# Altium PCB SensorPlatformV3.PcbDoc
Units mm, origin at the board's own origin, x right, y up, seen from the top; angles counter-clockwise.
Board outline 100 x 47 mm, 4 copper layers (Top Layer, Signal Layer 1, Signal Layer 2, Bottom Layer), stack 0.778 mm thick; 60 components, 59 nets, 412 pads, 0 vias.
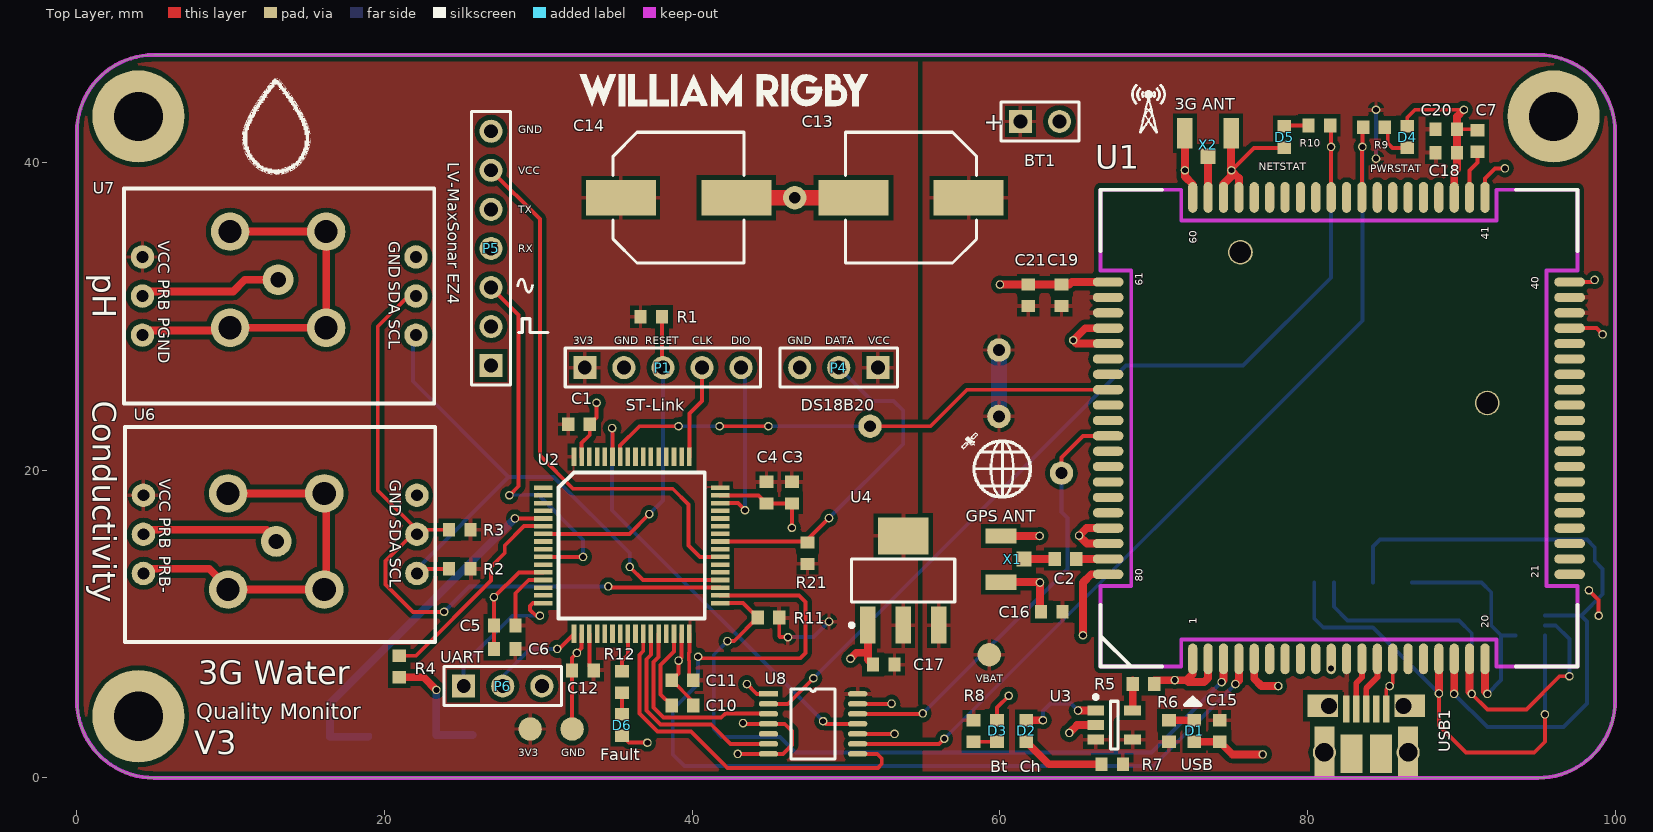
[diagram p0: Top Layer view]
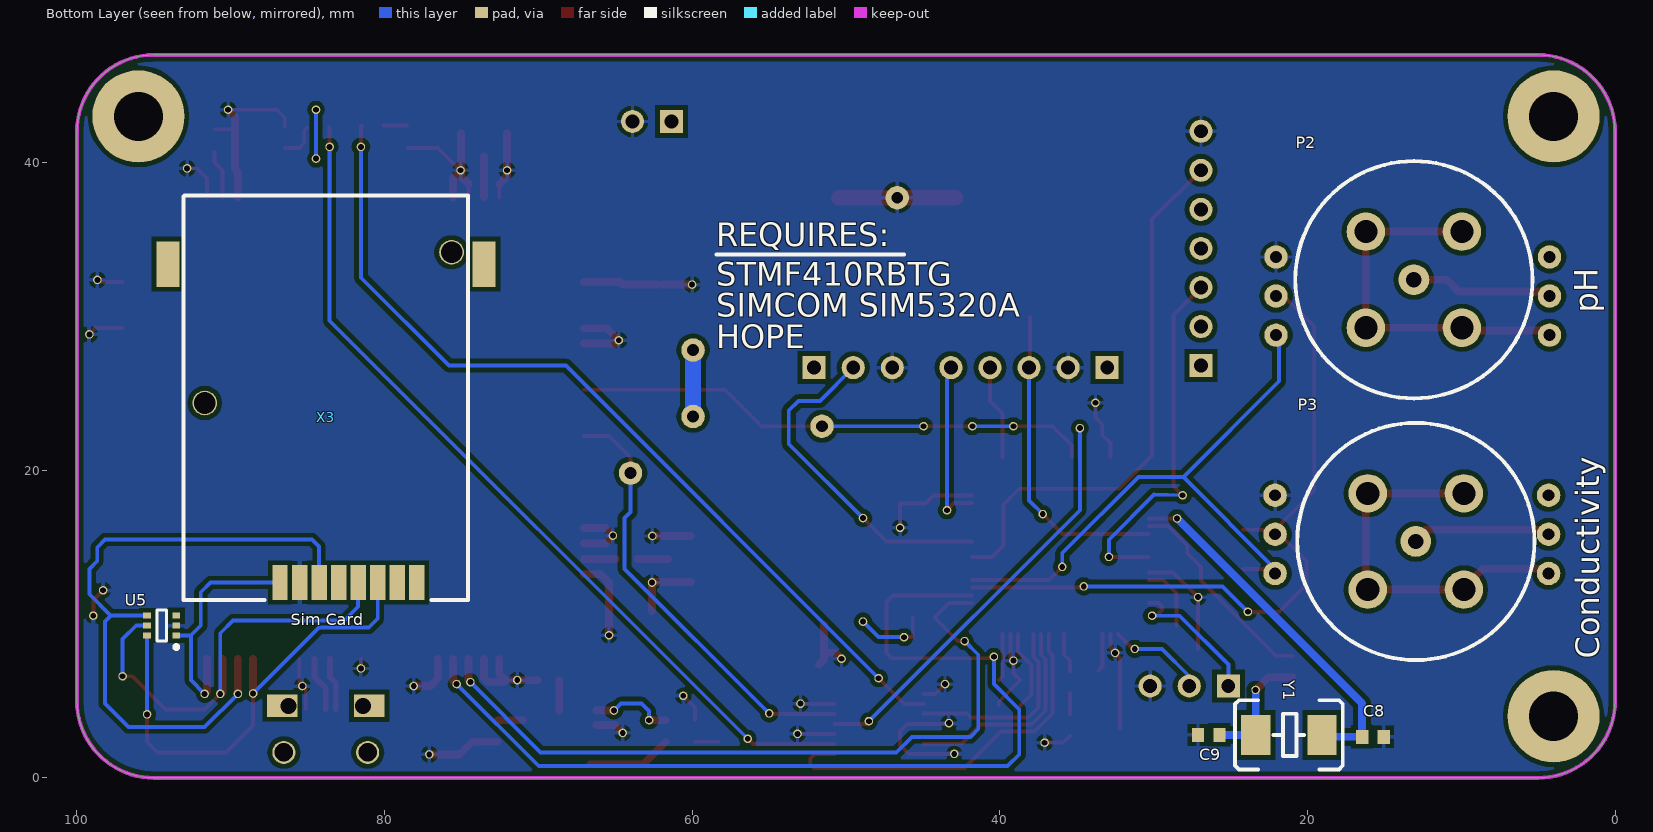
[diagram p1: Bottom Layer view, seen from below]

## Layer stack, top to bottom
Top Solder: solder mask 0.0102, Solder Resist, Dk 3.5
Top Layer: signal copper 0.0356
Dielectric 1: core 0.254, FR-4, Dk 4.2
Signal Layer 1: signal copper 0.036
Dielectric 3: prepreg 0.127, Dk 4.2
Signal Layer 2: signal copper 0.036
Dielectric 2: core 0.254, Dk 4.2
Bottom Layer: signal copper 0.0356
Bottom Solder: solder mask 0.0102, Solder Resist, Dk 3.5

## Board outline
0,5 0,42 cw(c5,42) 5,47 95,47 cw(c95,42) 100,42 100,5 cw(c95,5) 95,0 5,0 cw(c5,5)

## Design rules (kind name [scope] priority, off if disabled: settings)
Clearance [All] p1: gap=0.203 except(0.152: SMDPad-SMDPad; 0.305: Arc-Poly Track-Poly SMDPad-Poly THPad-Poly Via-Poly Fill-Poly Poly-Poly)
DiffPairsRouting [All] p1: maxlimit=0.254 minlimit=0.254 mostfreqgap=0.254 toplayer_minwidth=0.381 toplayer_maxwidth=0.381 toplayer_prefwidth=0.381 midlayer1_minwidth=0.381 midlayer1_maxwidth=0.381 midlayer1_prefwidth=0.381 midlayer2_minwidth=0.381 midlayer2_maxwidth=0.381 midlayer2_prefwidth=0.381 bottomlayer_minwidth=0.381 bottomlayer_maxwidth=0.381 bottomlayer_prefwidth=0.381 maxuncoupledlength=12.7
HoleSize [All] p1: absolutevalues=TRUE maxlimit=10.16 minlimit=0.305 maxpercent=80.000 minpercent=20.000
MatchedLengths [All] p1: tolerance=3.81 checknetsindiffpair=TRUE checkdiffpairvsdiffpair=FALSE checkxsignals=FALSE checkothers=FALSE
MinimumSolderMaskSliver [All] p1: minsoldermaskwidth=0.025
PlaneConnect [All] p1: planeconnectstyle=Relief reliefexpansion=0.508 reliefentries=4 reliefconductorwidth=0.508 reliefairgap=0.254
PolygonConnect [All] p1: connectstyle=Relief reliefconductorwidth=0.254 reliefentries=4 polygonreliefangle="90 Angle" airgapwidth=0.254
RoomDefinition SensorPlatformV3 [InComponentClass('SensorPlatformV3')] p1: confinementstyle=ConfineIn formatcopy=TRUE lockcomponents=FALSE outline -1.016,-1.905 100.838,-1.905 100.838,48.895 -1.016,48.895
RoutingVias [All] p1: holewidth=0.711 width=1.27 viastyle="Through Hole" minholewidth=0.711 minwidth=1.27 maxholewidth=0.711 maxwidth=1.27
SilkToSilkClearance [All] p1: silktosilkclearance=0.025
SilkToSolderMaskClearance [IsPad] p1: minsilkscreentomaskgap=0.025 clearancetoexposedcopper=TRUE
SolderMaskExpansion [All] p1: expansion=0.102
Width [All] p1: maxlimit=3.048 minlimit=0.152 preferedwidth=0.254
24 further rules are at their usual default settings.

## Classes and differential pairs
differential pair USB_D: +USB_D_P -USB_D_N

## Components (designator, comment, footprint, x,y, rotation, side; value= is the part's Value field where it differs from the comment)
BT1 "Battery" BAT-2 62.611,42.672 r0 top
C1 "Cap" 1608[0603] 32.639,22.987 r180 top
C2 "Cap" 1608[0603] 64.262,14.224 r180 top
C3 "Cap" 1608[0603] 46.482,18.542 r90 top
C4 "Cap" 1608[0603] 44.831,18.542 r90 top
C5 "Cap" 1608[0603] 27.813,9.906 r180 top
C6 "Cap" 1608[0603] 27.813,8.382 r180 top
C7 "Cap" 1608[0603] 91.059,41.402 r270 top
C8 "Cap" 1608[0603] 15.748,2.667 r180 bottom
C9 "Cap" 1608[0603] 26.416,2.794 r0 bottom
C10 "Cap" 1608[0603] 39.37,4.699 r180 top
C11 "Cap" 1608[0603] 39.37,6.35 r0 top
C12 "Cap" 1608[0603] 32.893,6.985 r0 top
C13 "Cap Pol2" CAPAE9983X105M 54.229,37.719 r180 top
C14 "Cap Pol2" CAPAE9983X105M 39.116,37.719 r0 top
C15 "Cap" 1608[0603] 74.295,3.048 r90 top
C16 "Cap" 1608[0603] 63.373,10.795 r0 top
C17 "Cap" 1608[0603] 52.451,7.366 r0 top
C18 "Cap" 1608[0603] 89.027,40.64 r0 top
C19 "Cap" 1608[0603] 64.008,31.369 r90 top
C20 "Cap" 1608[0603] 89.027,42.164 r0 top
C21 "Cap" 1608[0603] 61.849,31.369 r90 top
D1 "USB" 1608[0603] 72.644,3.048 r270 top
D2 "Ch" 1608[0603] 61.722,3.048 r90 top
D3 "Bt" 1608[0603] 59.817,3.048 r90 top
D4 "PWRSTAT" 1608[0603] 86.487,41.656 r90 top
D5 "NETSTAT" 1608[0603] 78.486,41.656 r270 top
D6 "Fault" 1608[0603] 35.433,3.429 r270 top
P1 "ST-Link" HDR1X5 33.02,26.67 r0 top
P2 "BNC" "BNC Connector" 13.081,32.385 r0 bottom
P3 "BNC" "BNC Connector" 12.954,15.367 r270 bottom
P4 "DS18B20" HDR1X3 52.07,26.67 r180 top
P5 "LV-MaxSonar EZ4" HDR1X7 26.924,26.797 r90 top
P6 "UART" HDR1X3 25.146,5.969 r0 top
R1 "Res1" 1608[0603] 37.338,29.972 r180 top
R2 "Res1" 1608[0603] 24.892,13.589 r0 top
R3 "Res1" 1608[0603] 24.892,16.129 r0 top
R4 "Res1" 1608[0603] 20.955,7.239 r270 top
R5 "Res1" 1608[0603] 69.342,6.096 r180 top
R6 "Res1" 1608[0603] 70.993,3.048 r270 top
R7 "Res1" 1608[0603] 67.31,0.889 r0 top
R8 "Res1" 1608[0603] 58.293,3.048 r90 top
R9 "Res1" 1608[0603] 84.328,42.291 r180 top
R10 "Res1" 1608[0603] 80.772,42.418 r0 top
R11 "Res1" 1608[0603] 44.958,10.414 r0 top
R12 "Res1" 1608[0603] 35.433,6.223 r90 top
R21 "Res1" 1608[0603] 47.498,14.605 r270 top
U1 "SIM5320A" SIM5320A 82.042,22.733 r90 top
U2 "STM32F410RBT6" STM32F410RBT6 36.068,15.113 r0 top
U3 "MCP73831T-2ACI/OT" SOT-23-OT5_N 67.437,3.429 r0 top
U4 "LM1117IMP-3.3" MP04A_N 53.721,12.827 r90 top
U5 "SMF05CT2G" ONSC-SC70-6-419B-02_W_V 94.488,9.906 r0 bottom
U6 "EZO Conductivity" "EZO Conductivity (No Writing)" 13.716,16.129 r270 top
U7 "EZO pH" "EZO pH Duplicate" 12.954,31.623 r270 top
U8 "MC74VHCT125A" TSSOP-14 44.958,5.461 r0 top
USB1 "USB Micro B Connector" "USB Micro B Connector" 83.82,1.651 r0 top
X1 "GPS ANT" "UFL Connector" 60.071,14.224 r90 top
X2 "3G ANT" "UFL Connector" 73.533,41.91 r0 top
X3 "Sim Card" "Sim Card" 73.533,12.7 r90 bottom
Y1 "XTAL" "16MHz Clock" 21.209,2.794 r0 bottom

## Footprints (in the part's own frame and the unit in brackets; to place one, negate y for a bottom-side part, rotate by r counter-clockwise, add the part's x,y. Pads: shape width x height; smd on the part's side, far side on the other; paste and mask are expansions set on the pad)
"16MHz Clock" [mm]
  rect 1.9x2.6 smd: 1(-2.15,0) 2(2.15,0)
  silkscreen extent -3.5,-2.25 3.5,2.25
1608[0603] [mm] "Chip Capacitor, Body 1.6x0.8mm, IPC High Density"
  rect 0.8x0.9 smd: 1(-0.7,0) 2(0.7,0)
  body extent -0.87,-0.48 0.87,0.48, height 1.3
BAT-2 [mm] "Battery; 2 Leads"
  rect 1.5x1.5 hole 0.9: 1(-1.27,0)
  round 1.5 hole 0.9: 2(1.27,0)
  silkscreen extent -2.54,-1.27 2.54,1.27
"BNC Connector" [mm]
  round 2 hole 1: 1(0,0)
  round 2.5 hole 1.5: 2(-3.125,-3.125) 2(-3.125,3.125) 2(3.125,-3.125) 2(3.125,3.125)
  silkscreen extent -7.71,-7.71 7.71,7.71
CAPAE9983X105M [mm] "Aluminum Electrolytic Capacitor, Body 8.30x8.30x10.50mm, IPC Low Density"
  rect 4.55x2.3 smd: 1(-3.75,0) 2(3.75,0)
  silkscreen extent -4.25,-4.25 4.25,4.25, body extent -4.25,-4.25 4.25,4.25, height 10.5
"EZO Conductivity (No Writing)" [mil]
  round 60 hole 30: 1(-88.19,330.32) 2(11.81,330.32) 3(111.81,330.32) 4(-88.19,-369.68) 5(11.81,-369.68) 6(111.81,-369.68)
  silkscreen extent -263,-417 287,377
"EZO pH Duplicate" [mil]
  round 60 hole 30: 1(-88.19,357.87) 2(11.81,357.87) 3(111.81,357.87) 4(-88.19,-342.13) 5(11.81,-342.13) 6(111.81,-342.13)
  silkscreen extent -263,-389 287,405
HDR1X3 [mm] "Connector; Header; 3 Position"
  rect 1.5x1.5 hole 0.9: 1(0,0)
  round 1.5 hole 0.9: 2(2.54,0) 3(5.08,0)
  silkscreen extent -1.27,-1.27 6.35,1.27
HDR1X5 [mm] "Connector; Header; 5 Position"
  rect 1.5x1.5 hole 0.9: 1(0,0)
  round 1.5 hole 0.9: 2(2.54,0) 3(5.08,0) 4(7.62,0) 5(10.16,0)
  silkscreen extent -1.27,-1.27 11.43,1.27
HDR1X7 [mm] "Connector; Header; 7 Position"
  rect 1.5x1.5 hole 0.9: 1(0,0)
  round 1.5 hole 0.9: 2(2.54,0) 3(5.08,0) 4(7.62,0) 5(10.16,0) 6(12.7,0) 7(15.24,0)
  silkscreen extent -1.27,-1.27 16.51,1.27
MP04A_N [mm] "SOT223, 4-Leads, Body 6.5x3.5mm, Pitch 2.3mm, Lead Span 7mm, IPC Medium Density"
  rect 2.4x1 smd: 1(-2.9,2.3) 2(-2.9,0) 3(-2.9,-2.3)
  rect 2.4x3.3 smd: 4(2.9,0)
  silkscreen extent -3.02,-3.35 1.4,3.47, body extent -1.86,-3.35 1.86,3.35, height 1.8
ONSC-SC70-6-419B-02_W_V [mm] "SOT23, 6-Leads, Body 2x1.25mm, Pitch 0.65mm"
  rect 0.5x0.4 smd: 1(-0.95,0.65) 2(-0.95,0) 3(-0.95,-0.65) 4(0.95,-0.65) 5(0.95,0) 6(0.95,0.65)
  silkscreen extent -1.07,-1 0.3,1.52, body extent -0.63,-1 0.63,1, height 1.1
SIM5320A [mm] "SIM5320A"
  oval 2x0.6 smd: 1(-15,9.5) 2(-15,8.5) 3(-15,7.5) 4(-15,6.5) 5(-15,5.5) 6(-15,4.5) 7(-15,3.5) 8(-15,2.5) 9(-15,1.5) 10(-15,0.5) 11(-15,-0.5) 12(-15,-1.5) 13(-15,-2.5) 14(-15,-3.5) 15(-15,-4.5) 16(-15,-5.5) 17(-15,-6.5) 18(-15,-7.5) 19(-15,-8.5) 20(-15,-9.5) 41(15,-9.5) 42(15,-8.5) 43(15,-7.5) 44(15,-6.5) 45(15,-5.5) 46(15,-4.5) 47(15,-3.5) 48(15,-2.5) 49(15,-1.5) 50(15,-0.5) 51(15,0.5) 52(15,1.5) 53(15,2.5) 54(15,3.5) 55(15,4.5) 56(15,5.5) 57(15,6.5) 58(15,7.5) 59(15,8.5) 60(15,9.5)
  oval 0.6x2 smd: 21(-9.5,-15) 22(-8.5,-15) 23(-7.5,-15) 24(-6.5,-15) 25(-5.5,-15) 26(-4.5,-15) 27(-3.5,-15) 28(-2.5,-15) 29(-1.5,-15) 30(-0.5,-15) 31(0.5,-15) 32(1.5,-15) 33(2.5,-15) 34(3.5,-15) 35(4.5,-15) 36(5.5,-15) 37(6.5,-15) 38(7.5,-15) 39(8.5,-15) 40(9.5,-15) 61(9.5,15) 62(8.5,15) 63(7.5,15) 64(6.5,15) 65(5.5,15) 66(4.5,15) 67(3.5,15) 68(2.5,15) 69(1.5,15) 70(0.5,15) 71(-0.5,15) 72(-1.5,15) 73(-2.5,15) 74(-3.5,15) 75(-4.5,15) 76(-5.5,15) 77(-6.5,15) 78(-7.5,15) 79(-8.5,15) 80(-9.5,15)
  Top Layer keep-out lines w0.254: -15.5,15.5 -10.25,15.5 -10.25,13.5 10.25,13.5 10.25,15.5 15.5,15.5 15.5,10.25 13.5,10.25 13.5,-10.25 15.5,-10.25 15.5,-15.5 10.25,-15.5 10.25,-13.5 -10.25,-13.5 -10.25,-15.5 -15.5,-15.5 -15.5,-10.25 -13.75,-10.25 -13.75,10.25 -15.5,10.25 -15.5,15.5
  silkscreen extent -18,-15.5 15.5,15.5
"Sim Card" [mm]
  rect 2.3x1 smd: 1(0,13.26) 2(0,11.99) 3(0,10.72) 4(0,9.45) 5(0,8.18) 6(0,6.91) ""(0,4.37) ""(0,5.64)
  round 1.6 hole 1.4: ""(11.67,18.16) ""(21.47,2.11)
  rect 2.95x1.5 smd: ""(20.7,0) ""(20.7,20.55)
  silkscreen extent -1.15,1.05 25.15,19.53
SOT-23-OT5_N [mm] "SOT23, 5-Leads, Body 2.9x1.6mm, Pitch 0.95mm, Lead Span 2.7mm, IPC Medium Density"
  rect 1.1x0.65 smd: 1(-1.2,0.95) 2(-1.2,0) 3(-1.2,-0.95) 4(1.2,-0.95) 5(1.2,0.95)
  silkscreen extent -1.32,-1.55 0.25,1.95, body extent -0.9,-1.55 0.9,1.55, height 1.45
STM32F410RBT6 [mm]
  rect 1.2x0.3 smd: 1(-5.75,3.75) 2(-5.75,3.25) 3(-5.75,2.75) 4(-5.75,2.25) 5(-5.75,1.75) 6(-5.75,1.25) 7(-5.75,0.75) 8(-5.75,0.25) 9(-5.75,-0.25) 10(-5.75,-0.75) 11(-5.75,-1.25) 12(-5.75,-1.75) 13(-5.75,-2.25) 14(-5.75,-2.75) 15(-5.75,-3.25) 16(-5.75,-3.75) 33(5.75,-3.75) 34(5.75,-3.25) 35(5.75,-2.75) 36(5.75,-2.25) 37(5.75,-1.75) 38(5.75,-1.25) 39(5.75,-0.75) 40(5.75,-0.25) 41(5.75,0.25) 42(5.75,0.75) 43(5.75,1.25) 44(5.75,1.75) 45(5.75,2.25) 46(5.75,2.75) 47(5.75,3.25) 48(5.75,3.75)
  rect 0.3x1.2 smd: 17(-3.75,-5.75) 18(-3.25,-5.75) 19(-2.75,-5.75) 20(-2.25,-5.75) 21(-1.75,-5.75) 22(-1.25,-5.75) 23(-0.75,-5.75) 24(-0.25,-5.75) 25(0.25,-5.75) 26(0.75,-5.75) 27(1.25,-5.75) 28(1.75,-5.75) 29(2.25,-5.75) 30(2.75,-5.75) 31(3.25,-5.75) 32(3.75,-5.75) 49(3.75,5.75) 50(3.25,5.75) 51(2.75,5.75) 52(2.25,5.75) 53(1.75,5.75) 54(1.25,5.75) 55(0.75,5.75) 56(0.25,5.75) 57(-0.25,5.75) 58(-0.75,5.75) 59(-1.25,5.75) 60(-1.75,5.75) 61(-2.25,5.75) 62(-2.75,5.75) 63(-3.25,5.75) 64(-3.75,5.75)
  silkscreen extent -4.75,-4.75 4.75,4.75
TSSOP-14 [mm]
  rect 1.26x0.36 smd: 1(0,0)
  oval 1.26x0.36 smd: 2(0,-0.65) 3(0,-1.3) 4(0,-1.95) 5(0,-2.6) 6(0,-3.25) 7(0,-3.9) 8(5.8,-3.9) 9(5.8,-3.25) 10(5.8,-2.6) 11(5.8,-1.95) 12(5.8,-1.3) 13(5.8,-0.65) 14(5.8,0)
  silkscreen extent 1.46,-4.23 4.34,0.33
"UFL Connector" [mm]
  rect 1x1 smd: 1(0,-1.5)
  rect 1x2 smd: 2(-1.5,0) 3(1.5,0)
"USB Micro B Connector" [mm]
  rect 0.4x1.75 smd: D+(0,2.825) D-(-0.65,2.825) GND(1.3,2.825) ID(0.65,2.825) VBUS(-1.3,2.825)
  rect 2x1.46 all layers, no hole: Mount(-2.825,3.03) Mount(2.825,3.03)
  round 1.5 hole 1.2: Mount(-2.725,0) Mount(2.725,0)
  rect 1.3x3.4 smd: Mount(-2.725,0) Mount(2.725,0)
  round 1.2 hole 1.05: Mount(-2.425,3.03) Mount(2.425,3.03)
  rect 1.425x2.5 smd: Mount(-0.95,-0.075) Mount(0.95,-0.075)

## Part data
BT1: "Multicell Battery"
C1 C2 C3 C4 C5 C6 C7 C8 C9 C10 C11 C12 C15 C16 C17 C18 C19 C20 C21: "Capacitor"
C13 C14: "Polarized Capacitor (Axial)"
D1 D2 D3 D4 D5 D6: library part LED0, "Typical INFRARED GaAs LED"
P1: library part "Header 5", "Header, 5-Pin"
P2 P3: "BNC Elbow Connector"
P4 P6: library part "Header 3", "Header, 3-Pin"
P5: library part "Header 7", "Header, 7-Pin"
R1 R2 R3 R4 R5 R6 R7 R8 R9 R10 R11 R12 R21: "Resistor"
U3: "Miniature Single-Cell, Fully Integrated Li-Ion, Li-Polymer Charge Management Controller, 4.2V, 5-Pin SOT-23, Industrial Temperature, Tape and Reel"
U4: "800mA Low-Dropout Linear Regulator, 4-pin SOT-223"
U5: "5-Line Transient Voltage Suppressor Array, 6-Pin SC70, Pb-Free, Tape and Reel"
X1 X2: library part "UFL Antenna"
X3: library part SIMCARD
Y1: "Crystal Oscillator"

## Free pads (board coordinates)
  round 0.559 hole 0.381: 0(23.368,5.715) 0(23.876,10.795) 0(27.113,11.746) 0(28.116,18.369) 0(28.476,16.863) 0(30.099,10.541) 0(31.226,8.382) 0(32.506,8.122) 0(32.905,14.363) 0(33.782,24.384) 0(34.544,12.446) 0(34.798,22.733) 0(35.941,13.716) 0(37.084,2.286) 0(37.211,17.145) 0(39.116,7.62) 0(39.116,22.86) 0(40.386,7.874) 0(41.783,22.86) 0(42.291,8.89) 0(42.963,1.561) 0(43.307,3.556) 0(43.434,17.399) 0(43.561,6.096) 0(44.958,22.86) 0(46.228,9.144) 0(46.482,16.256) 0(47.879,6.477) 0(48.514,3.683) 0(48.895,10.16) 0(48.895,16.891) 0(50.292,7.747) 0(52.959,4.826) 0(53.153,2.861) 0(54.991,4.191) 0(56.388,2.54) 0(60.006,32.069) 0(60.579,5.334) 0(62.587,15.724) 0(62.611,12.7) 0(62.8,3.748) 0(64.516,2.921) 0(64.77,28.448) 0(65.085,4.379) 0(65.151,15.748) 0(65.405,9.271) 0(71.374,6.35) 0(72.033,39.497) 0(74.422,6.223) 0(75.057,39.497) 0(75.311,6.096) 0(77.089,1.524) 0(78.105,5.969) 0(81.534,7.112) 0(81.534,41.021) 0(83.566,41.021) 0(84.455,40.259) 0(84.455,43.434) 0(85.344,5.969) 0(88.542,5.484) 0(89.535,5.461) 0(90.17,43.434) 0(90.678,5.461) 0(91.694,5.461) 0(92.837,39.624) 0(95.438,4.13) 0(97.028,6.604) 0(98.298,12.192) 0(98.667,32.373) 0(98.933,10.541) 0(99.187,28.829)
  round 1.524 hole 0.762: 0(46.672,37.719) 0(51.562,22.86) 0(59.944,23.495) 0(59.944,27.813) 0(64.008,19.812)
  round 6 hole 3.2: 2(4,4) 2(4,43) 2(96,43)
  round 1.524 smd: 3(29.464,3.175) 3(32.193,3.175) 3(59.309,8.001)

## Nets (pads, with @x,y where several pads share a name; then routed paths per layer and width w, separated by ;. In a path a pad name is that pad's centre, name@x,y a point inside that pad or via, vN(x,y) a via of type N, cw(c..) or ccw(c..) an arc to the next point about the centre after c; other vN are vias at no path point)
1.8V: pad.0@91.694,5.461 U1.20 U5.1 X3.1 | length 15.9
  Top Layer w0.254: pad.0@91.542,5.613 pad.0@91.694,5.461
  Top Layer w0.508: pad.0@91.542,5.613 U1.20
  Bottom Layer w0.254: X3.1 91.313,12.7 91.948,12.065 91.948,9.906 92.583,9.271 ; pad.0@91.694,5.461 92.583,6.35 92.583,9.271 ; U5.1 92.598,9.256 92.583,9.271
2.8V: U1.44
3V3: C1.2 C3.2 C4.2 C5.1 C6.1 C11.2 C12.2 C14.1 C17.2 P1.1 P4.1 pad.0@46.228,9.144 pad.0@48.895,10.16 pad.3@29.464,3.175 R1.2 R2.2 R3.2 R11.2 R21.2 U2.13 U2.19 U2.32 U2.48 U2.64 U4.2 U4.4 U6.4 U7.4 U8.14 | length 14.7
  Top Layer w0.254: C5.1 28.513,12.003 29.373,12.863 U2.13 ; U2.19 33.318,7.26 C12.2 ; 39.776,7.668 39.776,8.127 39.818,8.168 U2.32 ; 39.808,7.59 39.808,6.612 C11.2 ; R11.2 45.658,9.206 45.72,9.144 pad.0@46.228,9.144
  Bottom Layer w0.254: pad.0@46.228,9.144 47.879,9.144 pad.0@48.895,10.16
ADC1_13: P5.3 pad.0@28.116,18.369 pad.0@32.905,14.363 U2.10 | length 24.2
  Top Layer w0.254: P5.3 28.702,30.099 28.702,18.955 pad.0@28.116,18.369 ; U2.10 pad.0@32.905,14.363
  Bottom Layer w0.254: pad.0@28.116,18.369 29.972,18.415 32.905,15.482 pad.0@32.905,14.363
COND+: P3.1 U6.5 | length 9.1
  Top Layer w0.508: U6.5@4.318,16.129 4.326,16.129 12.319,16.129 13.018,15.43 P3.1@13.081,15.367
COND-: P3.2 U6.6 | length 24.9
  Top Layer w0.508: U6.6@4.318,13.589 4.326,13.589 8.609,13.589 9.892,12.305 9.956,12.242 16.079,12.242 16.206,12.242 16.206,18.492 16.079,18.492 P3.2@9.956,18.492
FAULT: R12.2 U2.24 | length 2.6
  Top Layer w0.254: R12.2 35.433,7.62 35.818,8.005 U2.24
GND: BT1.2 C1.1 C3.1 C4.1 C5.2 C6.2 C7.1 C8.2 C9.2 C10.1 C11.1 C12.1 C13.2 C14.2 C15.1 C16.1 C17.1 C18.2 C19.2 C20.2 C21.2 D1.2 D3.2 D4.2 D5.2 D6.2 P1.2 P4.3 P5.7 P6.3 pad.0@27.113,11.746 pad.0@32.506,8.122 pad.0@33.782,24.384 pad.0@37.084,2.286 pad.0@39.116,7.62 pad.0@42.963,1.561 pad.0@43.307,3.556 pad.0@43.561,6.096 pad.0@46.482,16.256 pad.0@46.672,37.719 pad.0@50.292,7.747 pad.0@52.959,4.826 pad.0@53.153,2.861 pad.0@60.006,32.069 pad.0@60.579,5.334 pad.0@62.587,15.724 pad.0@62.611,12.7 pad.0@64.77,28.448 pad.0@64.516,2.921 pad.0@65.151,15.748 pad.0@65.405,9.271 pad.0@71.374,6.35 pad.0@72.033,39.497 pad.0@75.057,39.497 pad.0@77.089,1.524 pad.0@78.105,5.969 pad.0@81.534,7.112 pad.0@85.344,5.969 pad.0@90.17,43.434 pad.0@92.837,39.624 pad.0@98.298,12.192 pad.0@98.667,32.373 pad.0@98.933,10.541 pad.0@99.187,28.829 pad.3@32.193,3.175 R5.1 U1.1 U1.2 U1.5 U1.10 U1.14 U1.37 U1.40 U1.41 U1.43 U1.57 U1.58 U1.60 U1.61 U1.64 U1.65 U1.77 U1.78 U1.80 U2.12 U2.18 U2.31 U2.47 U2.63 U3.2 U4.1 U5.2 U6.1 U7.1 U8.1 U8.4 U8.7 U8.10 U8.13 USB1.GND X1.2 X1.3 X2.2 X2.3 X3.2 | length 142.6
  Top Layer w0.254: C6.2 C5.2 27.113,11.746 28.73,13.363 U2.12 ; pad.3@32.193,3.175 C12.1 32.193,7.809 32.506,8.122 32.818,8.434 U2.18 ; U2.63 32.818,21.769 33.339,22.29 C1.1 33.782,23.43 pad.0@33.782,24.384 ; D6.2 35.876,2.286 pad.0@37.084,2.286 ; U2.31 39.318,7.822 39.116,7.62 39.116,6.796 C11.1 40.07,4.95 C10.1 ; U2.47 44.31,18.363 C4.1 C3.1 pad.0@46.482,16.256 ; pad.0@42.963,1.561 U8.7 45.902,1.561 46.482,2.141 46.482,3.048 46.019,3.511 U8.4 pad.0@43.352,3.511 ; pad.0@43.561,6.096 44.196,5.461 U8.1 ; U8.10 pad.0@53.153,2.861 ; U8.13 pad.0@52.944,4.811 ; D3.2 59.817,4.572 pad.0@60.579,5.334 ; pad.0@62.587,12.724 pad.0@62.611,12.7 ; pad.0@62.587,15.724 pad.0@62.611,15.748 ; C16.1@62.611,10.857 C16.1 ; U1.60 U1.60@72.542,38.583 ; U1.58 U1.58@74.542,38.601 ; pad.0@75.057,39.497 76.516,40.956 D5.2 ; pad.0@81.542,7.12 U1.10 ; USB1.GND 85.12,5.745 85.344,5.969 85.542,6.167 U1.14 ; D4.2 86.487,42.926 86.995,43.434 pad.0@90.17,43.434 ; C20.2 C7.1@90.997,42.164 ; U1.41 91.542,38.964 92.202,39.624 pad.0@92.837,39.624 ; U1.37 98.783,29.233 pad.0@99.187,28.829 ; U1.40 98.527,32.233 pad.0@98.667,32.373 ; pad.0@98.298,12.192 98.933,11.557 pad.0@98.933,10.541
  Top Layer w0.508: pad.0@50.292,7.747 50.673,8.128 51.421,8.128 ; U4.1 51.421,8.128 ; C17.1 51.421,7.696 51.421,8.128 ; pad.0@60.006,32.069 C21.2 ; X1.2 pad.0@62.587,12.724 ; X1.3 pad.0@62.587,15.724 ; C21.2@62.23,32.069 C19.2 64.516,32.069 64.68,32.233 U1.61 ; C16.1@62.611,10.857 pad.0@62.611,12.7 ; pad.0@64.516,2.921 65.024,3.429 U3.2 ; pad.0@65.405,9.271 65.405,12.7 65.938,13.233 U1.80 ; U1.78 65.666,15.233 65.151,15.748 65.636,16.233 U1.77 ; U1.65 64.985,28.233 64.77,28.448 65.555,29.233 U1.64 ; R5.1@70.042,6.35 72.136,6.35 72.542,6.756 U1.1 ; X2.2 72.033,39.497 72.033,39.092 U1.60@72.542,38.583 ; 72.263,6.223 73.279,6.223 73.542,6.486 U1.2 ; D1.2 C15.1 75.119,1.524 pad.0@77.089,1.524 ; U1.58@74.542,38.601 75.033,39.092 pad.0@75.033,39.497 ; X2.3 pad.0@75.033,39.497 ; U1.57 75.542,38.988 pad.0@75.033,39.497 ; U1.5 76.542,6.438 77.011,5.969 pad.0@78.105,5.969 ; U1.43 89.542,39.377 89.727,39.562 C18.2 C20.2 89.727,42.991 pad.0@90.17,43.434
  Top Layer w1.016: C14.2 46.672,37.719 C13.2
GPS_ANT: C2.1 U1.79 | length 2.1
  Top Layer w0.508: C2.1@64.971,14.233 U1.79
GSM_ANT: U1.59 X2.1 | length 2.7
  Top Layer w0.254: U1.59@73.533,37.742 U1.59
  Top Layer w0.508: U1.59@73.533,37.742 X2.1
I2C1_SCL: U2.61
I2C1_SDA: U2.62
I2C4_SCL: pad.0@35.941,13.716 R2.1 U2.36 U6.3 U7.3 | length 39.7
  Top Layer w0.254: U6.3@22.098,13.589 R2.1 ; pad.0@35.941,13.716 36.794,12.863 U2.36
  Bottom Layer w0.254: U7.3@21.844,29.083 21.844,25.781 28.067,19.558 ; U6.3@22.098,13.589 28.067,19.558 ; pad.0@35.941,13.716 35.941,14.605 30.988,19.558 28.067,19.558
I2C4_SDA: pad.0@23.876,10.795 pad.0@34.544,12.446 R3.1 U2.35 U6.2 U7.2 | length 47.2
  Top Layer w0.254: U7.2@21.844,31.623 19.558,29.337 19.558,18.669 U6.2@22.098,16.129 ; pad.0@23.876,10.795 21.844,10.795 20.066,12.573 20.066,14.097 U6.2@22.098,16.129 ; R3.1 U6.2@22.098,16.129 ; pad.0@34.544,12.446 34.627,12.363 U2.35
  Bottom Layer w0.254: pad.0@23.876,10.795 25.527,12.446 pad.0@34.544,12.446
MX-BW: P5.1
MX-PW: P5.2
MX-RX: P5.4
MX-TX: P5.5
MX-VCC: P5.6 U2.39 | length 35.9
  Top Layer w0.254: P5.6 30.099,36.322 30.099,20.955 32.258,18.796 38.735,18.796 39.751,17.78 39.751,15.113 40.501,14.363 U2.39
NetC2_2: C2.2 X1.1 | length 2
  Top Layer w0.508: X1.1 C2.2
NetC7_2: C7.2 U1.42 | length 3.2
  Top Layer w0.254: U1.42 90.542,39.488 91.059,40.005 C7.2
NetC9_1: C9.1 pad.0@23.368,5.715 R4.2 Y1.2 | length 8
  Top Layer w0.508: R4.2 22.544,6.539 pad.0@23.368,5.715
  Bottom Layer w0.254: Y1.2 Y1.2@23.368,2.803
  Bottom Layer w0.508: Y1.2 C9.1 ; Y1.2@23.368,2.803 pad.0@23.368,5.715
NetC10_2: C10.2 U2.30 | length 5.3
  Top Layer w0.254: C10.2 37.94,5.429 37.94,7.333 38.818,8.211 38.818,8.574 U2.30
NetD1_1: D1.1 R6.1 | length 1.7
  Top Layer w0.508: R6.1 D1.1
NetD2_1: D2.1 R7.1 | length 5.5
  Top Layer w0.508: D2.1 63.181,0.889 R7.1
NetD2_2: D2.2 pad.0@62.8,3.748 pad.0@65.085,4.379 U3.1 | length 5.5
  Top Layer w0.508: D2.2 pad.0@62.8,3.748 ; pad.0@65.085,4.379 U3.1
  Bottom Layer w0.254: pad.0@62.8,3.748 62.8,4.344 63.282,4.826 64.638,4.826 pad.0@65.085,4.379
NetD3_1: D3.1 R8.1 | length 1.5
  Top Layer w0.254: R8.1 D3.1
NetD4_1: D4.1 R9.1 | length 2.5
  Top Layer w0.254: R9.1 85.217,42.102 85.217,41.275 85.536,40.956 D4.1
NetD5_1: D5.1 R10.1 | length 1.5
  Top Layer w0.254: D5.1@78.548,42.418 R10.1
NetD6_1: D6.1 R12.1 | length 1.4
  Top Layer w0.254: D6.1 R12.1
NetR5_2: R5.2 U3.5 | length 2
  Top Layer w0.508: U3.5 68.642,4.384 R5.2 R5.2@68.642,6.35
NETSTAT_SIM: pad.0@47.879,6.477 pad.0@81.534,41.021 R10.2 U1.51 U8.2 | length 61.3
  Top Layer w0.254: U8.2 46.213,4.811 pad.0@47.879,6.477 ; R10.2 81.534,42.356 81.534,41.021 81.534,37.741 U1.51
  Bottom Layer w0.254: pad.0@47.879,6.477 68.199,26.797 75.819,26.797 81.534,32.512 pad.0@81.534,41.021
NETSTAT_STM: U2.28 U8.3 | length 12.8
  Top Layer w0.254: U2.28 37.818,7.858 37.483,7.522 37.483,4.569 38.133,3.919 41.892,3.919 42.164,4.191 44.928,4.191 U8.3
OSC_IN: C8.1 pad.0@28.476,16.863 U2.5 Y1.1 | length 23.7
  Top Layer w0.254: pad.0@28.476,16.863 U2.5
  Bottom Layer w0.254: Y1.1@18.932,2.667 Y1.1
  Bottom Layer w0.508: Y1.1@18.932,2.667 C8.1 16.448,4.835 pad.0@28.476,16.863
OSC_OUT: R4.1 U2.6 | length 13.7
  Top Layer w0.254: R4.1 22.036,7.939 26.924,12.827 26.924,13.716 27.813,14.605 27.813,15.113 29.063,16.363 U2.6
PH+: P2.1 U7.5 | length 9.3
  Top Layer w0.508: U7.5@4.064,31.623 4.264,31.623 10.16,31.623 10.922,32.385 P2.1
PH-: P2.2 U7.6 | length 24.7
  Top Layer w0.254: P2.2@9.779,29.083 P2.2@9.956,29.26
  Top Layer w0.508: U7.6@4.064,29.083 4.264,29.083 P2.2@9.779,29.083 ; P2.2@9.956,29.26 16.206,29.26 16.206,35.51 P2.2@9.956,35.51
PWR_CTRL: pad.0@42.291,8.89 pad.0@74.422,6.223 R11.1 U1.3 U2.33 | length 48.6
  Top Layer w0.254: U2.33 43.309,11.363 R11.1 42.734,8.89 pad.0@42.291,8.89
  Top Layer w0.508: pad.0@74.422,6.223 74.542,6.343 U1.3
  Bottom Layer w0.254: pad.0@42.291,8.89 41.402,8.001 41.402,3.175 41.91,2.667 45.72,2.667 46.736,1.651 69.85,1.651 pad.0@74.422,6.223
PWRSTAT_SM: pad.0@56.388,2.54 pad.0@83.566,41.021 R9.2 U1.49 U8.9 | length 60.1
  Top Layer w0.254: U8.9 56.059,2.211 pad.0@56.388,2.54 ; U1.49 83.542,40.997 83.566,41.021 83.566,42.229 R9.2
  Bottom Layer w0.254: pad.0@56.388,2.54 83.566,29.718 pad.0@83.566,41.021
PWRSTAT_STM: U2.26 U8.8 | length 24.7
  Top Layer w0.254: U2.26@36.798,9.343 U2.26 36.818,8.236 36.568,7.987 36.568,4.191 37.754,3.004 39.922,3.004 42.291,0.635 52.07,0.635 52.324,0.889 52.324,1.27 52.033,1.561 U8.8
RESET: P1.3 pad.0@37.211,17.145 R1.1 U2.7 | length 20.6
  Top Layer w0.254: U2.7 35.929,15.863 pad.0@37.211,17.145 ; R1.1 38.038,26.732 P1.3
  Bottom Layer w0.254: pad.0@37.211,17.145 38.1,18.034 P1.3
RESET_SIMCOM: pad.0@40.386,7.874 pad.0@75.311,6.096 U1.4 U2.34 | length 64.1
  Top Layer w0.254: pad.0@40.386,7.874 40.386,7.772 47.015,7.772 47.371,8.128 47.371,11.43 46.938,11.863 U2.34
  Top Layer w0.508: pad.0@75.311,6.096 75.542,6.327 U1.4
  Bottom Layer w0.254: pad.0@40.386,7.874 40.386,6.096 38.735,4.445 38.735,1.524 39.497,0.762 69.977,0.762 pad.0@75.311,6.096
RI_SM: U8.5
RI_STM: U2.27 U8.6 | length 13.9
  Top Layer w0.254: U2.27 37.318,8.004 37.025,7.712 37.025,4.38 37.944,3.462 41.242,3.462 42.493,2.211 U8.6
RXD: pad.0@39.116,22.86 pad.0@41.783,22.86 pad.0@44.958,22.86 pad.0@51.562,22.86 U1.68 U2.58 | length 34.1
  Top Layer w0.254: U2.58 35.318,21.602 36.576,22.86 pad.0@39.116,22.86 ; pad.0@41.783,22.86 pad.0@44.958,22.86 ; pad.0@51.562,22.86 55.499,22.86 57.872,25.233 U1.68
  Bottom Layer w0.254: pad.0@39.116,22.86 pad.0@41.783,22.86 ; pad.0@44.958,22.86 51.562,22.86 pad.0@51.689,22.86
SIM_CLK: pad.0@90.678,5.461 pad.0@97.028,6.604 U1.19 U5.5 X3.5 | length 29.6
  Top Layer w0.254: pad.0@90.678,5.461 91.694,4.445 94.234,4.445 96.393,6.604 pad.0@97.028,6.604
  Top Layer w0.508: U1.19 90.542,5.597 pad.0@90.678,5.461
  Bottom Layer w0.254: X3.5 81.713,11.124 82.601,10.236 89.84,10.236 90.678,9.398 pad.0@90.678,5.461 ; U5.5 96.139,9.906 97.028,9.017 pad.0@97.028,6.604
SIM_DATA: pad.0@88.542,5.484 pad.0@95.438,4.13 U1.17 U5.6 X3.6 | length 31.6
  Top Layer w0.254: pad.0@88.542,5.484 88.542,3.406 90.297,1.651 94.742,1.651 95.438,2.347 pad.0@95.438,4.13
  Top Layer w0.508: pad.0@88.542,5.484 U1.17
  Bottom Layer w0.254: X3.6 80.443,10.362 81.026,9.779 84.247,9.779 pad.0@88.542,5.484 ; pad.0@95.438,4.13 U5.6
SIM_RST: pad.0@89.535,5.461 U1.18 U5.4 X3.3 | length 43.1
  Top Layer w0.508: pad.0@89.535,5.461 89.542,5.962 U1.18
  Bottom Layer w0.254: X3.3 84.253,15.038 84.709,15.494 98.171,15.494 98.679,14.986 98.679,14.097 99.187,13.589 99.187,11.938 97.805,10.556 ; pad.0@89.535,5.461 91.694,3.302 96.647,3.302 98.171,4.826 98.171,10.16 97.805,10.526 97.805,10.556 ; U5.4 97.805,10.556
SWCLK: P1.4 U2.49 | length 6.1
  Top Layer w0.254: U2.49 39.818,23.689 40.64,24.511 P1.4
SWDIO: P1.5 pad.0@43.434,17.399 U2.46 | length 11.2
  Top Layer w0.254: U2.46 42.97,17.863 pad.0@43.434,17.399
  Bottom Layer w0.254: P1.5 43.434,26.416 pad.0@43.434,17.399
TEMP: P4.2 pad.0@48.895,16.891 R21.1 U2.41 | length 22
  Top Layer w0.254: U2.41 47.367,15.363 pad.0@48.895,16.891
  Bottom Layer w0.254: pad.0@48.895,16.891 53.721,21.717 53.721,23.876 53.086,24.511 51.689,24.511 P4.2
TXD: pad.0@54.991,4.191 pad.0@64.008,19.812 U1.71 U8.12 | length 28.5
  Top Layer w0.254: U8.12 54.961,4.161 pad.0@54.991,4.191 ; pad.0@64.008,19.812 64.008,20.828 65.413,22.233 U1.71
  Bottom Layer w0.254: pad.0@54.991,4.191 64.389,13.589 64.389,16.891 64.008,17.272 pad.0@64.008,19.812
USART1_RX: pad.0@34.798,22.733 pad.0@48.514,3.683 U2.59 U8.11 | length 28.9
  Top Layer w0.254: pad.0@34.798,22.733 34.818,22.205 U2.59 ; pad.0@48.514,3.683 48.686,3.511 U8.11
  Bottom Layer w0.254: pad.0@34.798,22.733 34.798,17.399 pad.0@48.514,3.683
USART2_RX: P6.2 pad.0@31.226,8.382 U2.17 | length 6.5
  Top Layer w0.254: pad.0@31.115,8.382 31.226,8.382 31.337,8.382 U2.17
  Bottom Layer w0.254: P6.2 27.686,6.604 29.464,8.382 pad.0@31.226,8.382
USART2_TX: P6.1 pad.0@30.099,10.541 U2.16 | length 9.6
  Top Layer w0.254: pad.0@30.099,10.541 29.845,10.541 29.464,10.922 29.464,11.176 29.651,11.363 U2.16
  Bottom Layer w0.254: P6.1 25.146,7.366 28.321,10.541 pad.0@30.099,10.541
USB_D_N: U1.12 USB1.D- | length 3.4
  Top Layer w0.381: USB1.D- 83.17,6.171 83.542,6.542 U1.12
USB_D_P: U1.13 USB1.D+ | length 3.6
  Top Layer w0.381: USB1.D+ 83.82,5.821 84.542,6.542 U1.13
VBAT: BT1.1 C13.1 C16.2 C18.1 C19.1 C20.1 C21.1 pad.0@59.944,23.495 pad.0@59.944,27.813 pad.0@84.455,40.259 pad.0@84.455,43.434 pad.3@59.309,8.001 R8.2 U1.38 U1.39 U1.62 U1.63 U3.3 U4.3 | length 7.5
  Bottom Layer w0.254: pad.0@84.455,40.259 pad.0@84.455,43.434
  Bottom Layer w1.016: pad.0@59.944,23.495 pad.0@59.944,27.813
VBUS: C15.2 R6.2 R7.2 U1.11 U3.4 USB1.VBUS
pads on no net: U1.6 U1.7 U1.8 U1.9 U1.15 U1.16 U1.21 U1.22 U1.23 U1.24 U1.25 U1.26 U1.27 U1.28 U1.29 U1.30 U1.31 U1.32 U1.33 U1.34 U1.35 U1.36 U1.45 U1.46 U1.47 U1.48 U1.50 U1.52 U1.53 U1.54 U1.55 U1.56 U1.66 U1.67 U1.69 U1.70 U1.72 U1.73 U1.74 U1.75 U1.76 U2.1 U2.2 U2.3 U2.4 U2.8 U2.9 U2.11 U2.14 U2.15 U2.20 U2.21 U2.22 U2.23 U2.25 U2.29 U2.37 U2.38 U2.40 U2.42 U2.43 U2.44 U2.45 U2.50 U2.51 U2.52 U2.53 U2.54 U2.55 U2.56 U2.57 U2.60 U5.3 USB1.ID USB1.Mount X3. X3.4

## Polygon pours and split planes (outlines as drawn)
VBUS on Top Layer "VBUS_L01_P000" (solid, remove dead copper, pour order 0): 83.693,0 83.693,6.985 83.439,6.731 67.691,6.731 67.691,0
VBAT on Top Layer "VBAT_L01_P002" (solid, remove dead copper, pour order 2): 54.991,0 54.991,58.293 131.572,58.293 131.826,58.039 125.095,51.308 125.095,-10.414
3V3 on Top Layer "3V3_L01_P006" (solid, remove dead copper, pour order 6): 56.642,-5.588 57.658,-4.572 57.658,54.102 1.27,54.102 -2.54,50.292 -5.207,47.625 -5.207,-4.699
GND on Bottom Layer "GND_L04_P008" (solid, remove dead copper, pour order 8): -13.208,61.722 -13.208,-10.795 -9.779,-14.224 -7.493,-11.938 120.777,-11.938 120.777,64.77 118.11,67.437

## Keep-outs
Keep-Out Layer:
  the board outline again, w0.254

## Silkscreen, mask and mechanical layers (free items; w line width, h text height)
Top Overlay:
  drawing of 102 lines, arcs and shapes, not listed
  text "GND" at 28.702,41.91 h0.51
  text "VCC" at 28.702,39.243 h0.51
  text "TX" at 28.702,36.703 h0.51
  text "RX" at 28.702,34.163 h0.51
  text "pH" at 1.016,32.766 h1.52 r270
  text "3V3" at 32.258,28.194 h0.51
  text "GND" at 34.925,28.194 h0.51
  text "RESET" at 36.957,28.194 h0.51
  text "CLK" at 40.005,28.194 h0.51
  text "DIO" at 42.545,28.194 h0.51
  text "GND" at 46.228,28.194 h0.51
  text "DATA" at 48.641,28.194 h0.51
  text "VCC" at 51.435,28.194 h0.51
  text "Conductivity" at 1.016,24.511 h1.52 r270
  text "VBAT" at 58.42,6.223 h0.51
  text "3G Water" at 7.874,6.096 h1.52
  text "Quality Monitor" at 7.747,3.81 h1.02
  text "V3" at 7.62,1.524 h1.52
  text "3V3" at 28.702,1.397 h0.51
  text "GND" at 31.496,1.397 h0.51
Bottom Overlay:
  lines w0.254: 46.228,34.036 58.42,34.036
  text "REQUIRES:" at 58.42,34.544 h1.52
  text "STMF410RBTG" at 58.42,32.004 h1.52
  text "pH" at 1.143,30.226 h1.52 r270
  text "SIMCOM SIM5320A" at 58.42,29.972 h1.52
  text "HOPE" at 58.42,27.94 h1.52
  text "Conductivity" at 1.016,7.747 h1.52 r270

## Text inside footprints (layer, text, board x,y; h text height)
BT1: Top Overlay "+" at 58.941,42.095 h1.15
U1: Top Overlay "1" at 72.792,9.983 h0.51 r90; Top Overlay "20" at 91.792,9.733 h0.51 r90; Top Overlay "21" at 95.042,12.983 h0.51 r90; Top Overlay "40" at 95.042,31.733 h0.51 r90; Top Overlay "41" at 91.792,34.983 h0.51 r90; Top Overlay "60" at 72.792,34.733 h0.51 r90; Top Overlay "61" at 69.292,31.983 h0.51 r90; Top Overlay "80" at 69.292,12.733 h0.51 r90
U6: Top Overlay "GND" at 20.328,19.379 h0.76 r270; Top Overlay "SDA" at 20.328,16.804 h0.76 r270; Top Overlay "SCL" at 20.328,14.304 h0.76 r270; Top Overlay "VCC" at 5.342,19.429 h0.76 r270; Top Overlay "PRB" at 5.342,16.929 h0.76 r270; Top Overlay "PRB-" at 5.342,14.454 h0.76 r270
U7: Top Overlay "PGND" at 5.28,29.948 h0.76 r270; Top Overlay "PRB" at 5.28,32.423 h0.76 r270; Top Overlay "VCC" at 5.28,34.923 h0.76 r270; Top Overlay "SCL" at 20.266,29.798 h0.76 r270; Top Overlay "SDA" at 20.266,32.298 h0.76 r270; Top Overlay "GND" at 20.266,34.873 h0.76 r270